# Altium PCB m.2 mk3.PcbDoc
Units mil, origin at the board's own origin, x right, y up, seen from the top; angles counter-clockwise.
Board outline 866.14 x 1181.1 mil, 2 copper layers (Top Layer, Bottom Layer), stack 31.1 mil thick; 19 components, 15 nets, 127 pads, 19 vias.
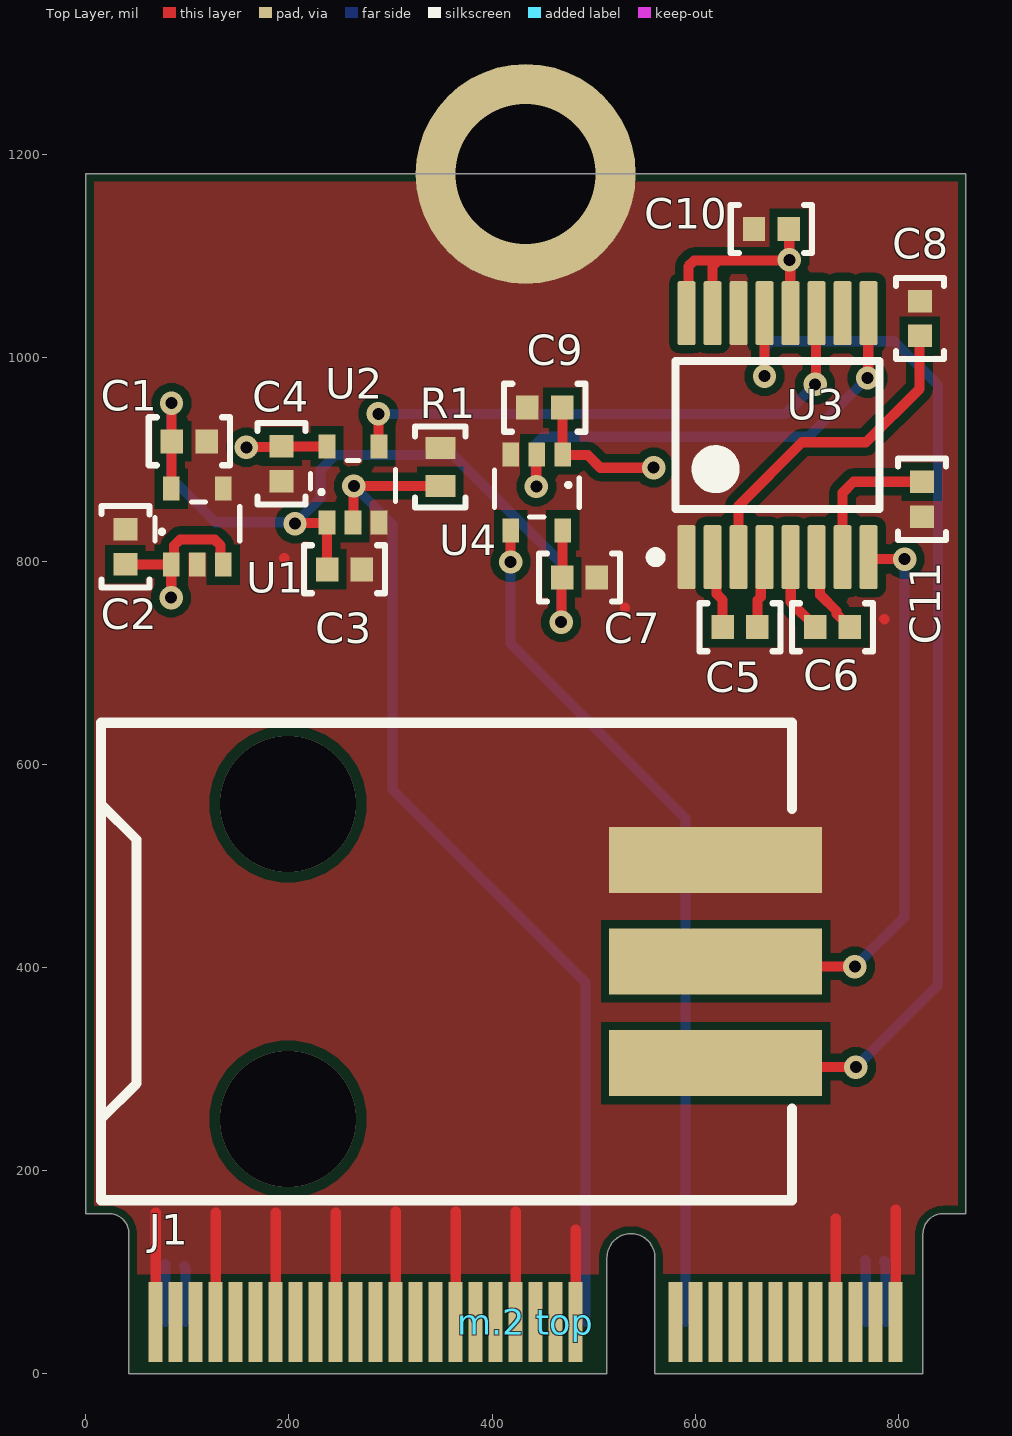
[diagram p0: Top Layer view]
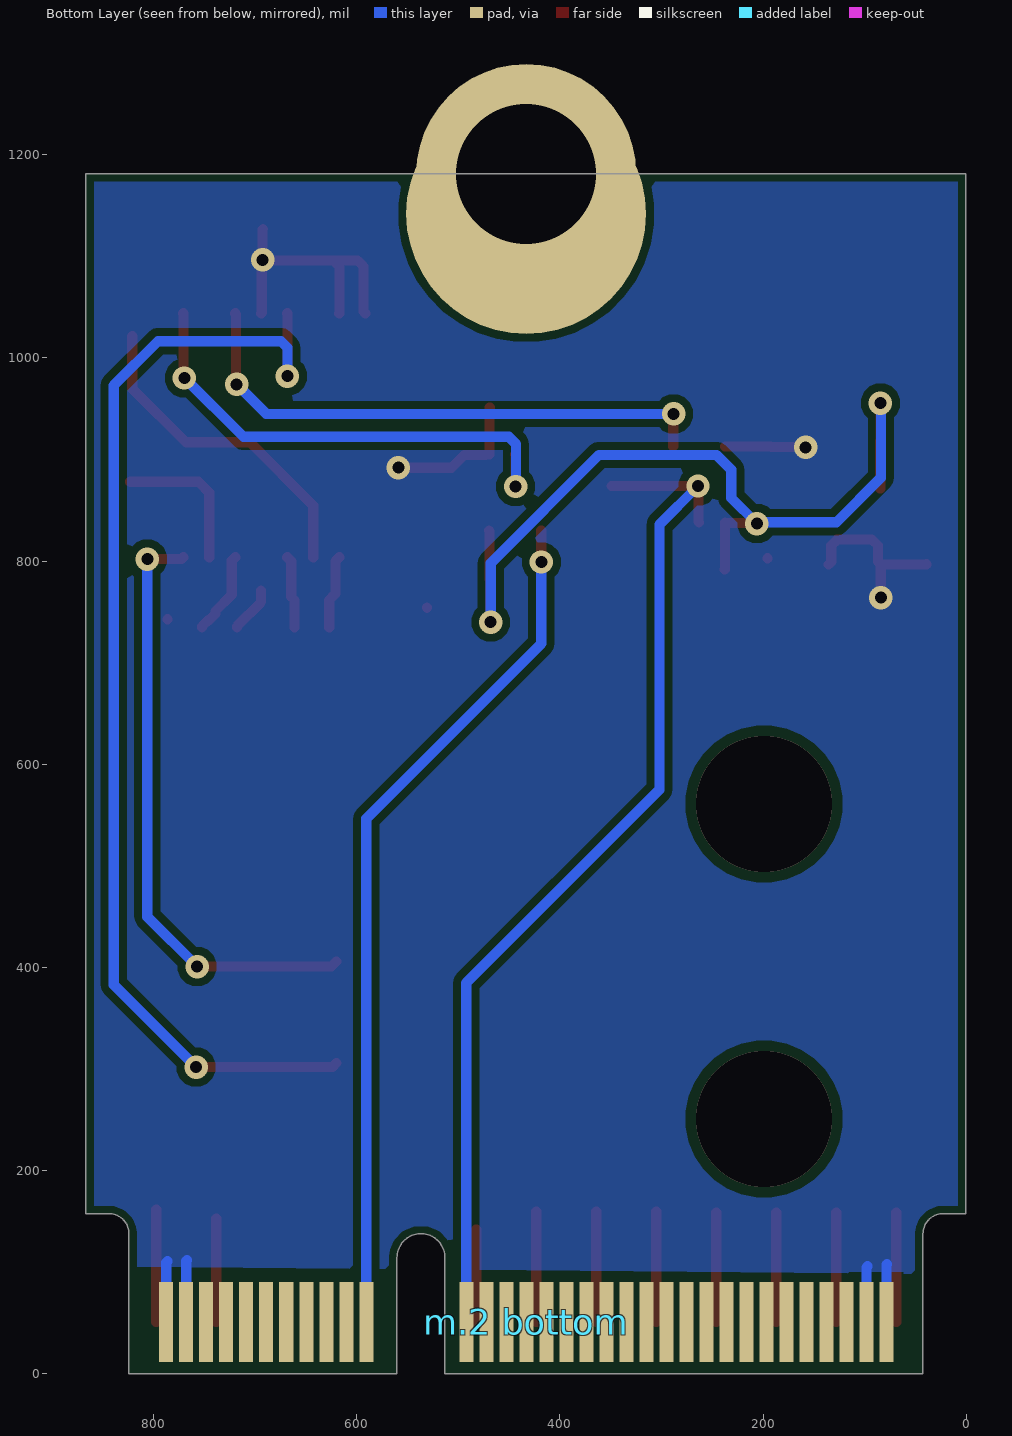
[diagram p1: Bottom Layer view, seen from below]
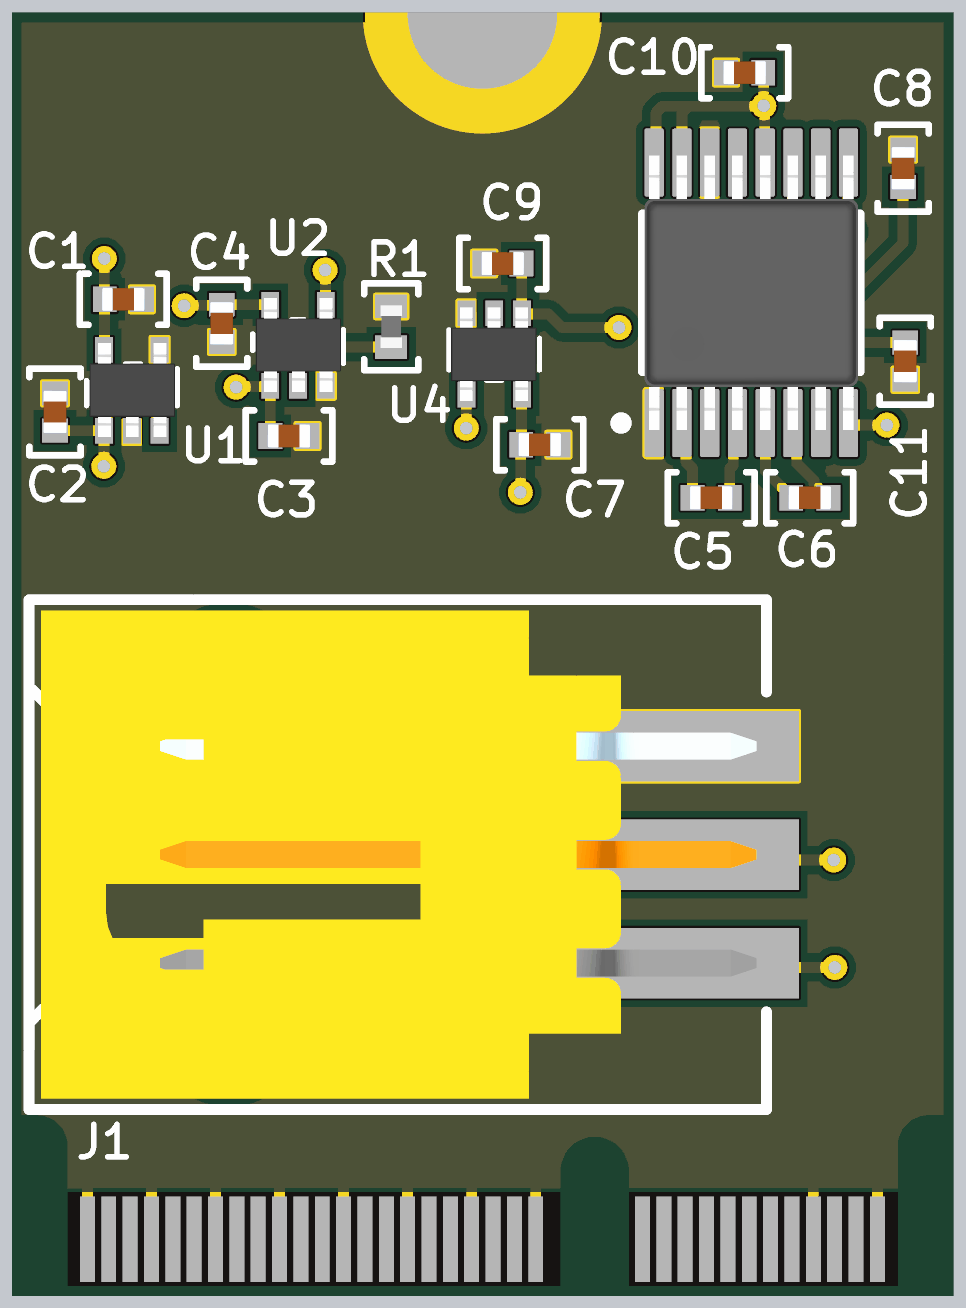
[diagram p2: 3D render of the assembled board from above, using the file's embedded part models]

## Layer stack, top to bottom
Top Solder: solder mask 0.4, Solder Resist, Dk 3.5
Top Layer: signal copper 1.4
Dielectric 1: dielectric 28.3, FR-4, Dk 4.8
Bottom Layer: signal copper 1.4
Bottom Solder: solder mask 0.4, Solder Resist, Dk 3.5

## Board outline
42.57,0.25 42.57,138.05 ccw(c22.89,138.05) 22.89,157.73 0.25,157.73 0.25,1181.35 866.39,1181.35 866.39,157.73 843.75,157.73 ccw(c843.75,138.05) 824.07,138.05 824.07,0.25 560.29,0.25 560.29,114.42 ccw(c536.67,114.42) 513.05,114.42 513.05,0.25

## Design rules (kind name [scope] priority, off if disabled: settings)
AcuteAngle [All] p1 off: minimum=6.00000000000000E+0001 checktracksonly=FALSE
BoardOutlineClearance "BoardOutlineClearance JLCPCB" [All] p1: gap=7.87 ignorepadtopadclearanceinfootprint=FALSE
Clearance "Clearance JLCPCB 1oz" [All] p1: gap=7.87 ignorepadtopadclearanceinfootprint=FALSE except(5: Arc-Arc Arc-Track Arc-SMDPad Track-Track Track-SMDPad SMDPad-SMDPad; 10: Arc-Hole Track-Hole SMDPad-Hole THPad-Hole Via-Hole Fill-Hole Poly-Hole Region-Hole Text-Hole)
DiffPairsRouting [All] p1: maxlimit=10 minlimit=6 mostfreqgap=8 toplayer_minwidth=8 toplayer_maxwidth=15 toplayer_prefwidth=8 bottomlayer_minwidth=8 bottomlayer_maxwidth=15 bottomlayer_prefwidth=8 maxuncoupledlength=500
HoleSize "HoleSize JLCPCB Pad" [IsPad] p1: absolutevalues=TRUE maxlimit=248.03 minlimit=19.68 maxpercent=80.000 minpercent=20.000
HoleSize "HoleSize JLCPCB 2 layer" [All] p2: absolutevalues=TRUE maxlimit=248.03 minlimit=11.81 maxpercent=80.000 minpercent=20.000
HoleToHoleClearance "HoleToHoleClearance JLCPCB" [All] p1: gap=10 allowstackedmicrovias=TRUE
MinimumAnnularRing "MinimumAnnularRing JLCPCB Pad" [IsPad] p1: minimumring=11.81
MinimumAnnularRing "MinimumAnnularRing JLCPCB 1oz" [All] p2: minimumring=5.24
MinimumSolderMaskSliver [All] p1: minsoldermaskwidth=1
PlaneConnect [All] p1: planeconnectstyle=Direct reliefexpansion=20 reliefentries=4 reliefconductorwidth=10 reliefairgap=10
PolygonConnect "PolygonConnect 3V3" [InNet('3V3')] p1: thpad.connectstyle=Relief thpad.reliefconductorwidth=10 thpad.reliefentries=4 thpad.polygonreliefangle="90 Angle" thpad.airgapwidth=10 smdpad.connectstyle=Relief smdpad.reliefconductorwidth=10 smdpad.reliefentries=4 smdpad.polygonreliefangle="90 Angle" smdpad.airgapwidth=10 via.connectstyle=Direct via.reliefconductorwidth=10 via.reliefentries=4 via.polygonreliefangle="90 Angle" via.airgapwidth=10
PolygonConnect "PolygonConnect Direct Connect" [All] p2: connectstyle=Direct reliefconductorwidth=15 reliefentries=4 polygonreliefangle="45 Angle" airgapwidth=10
RoutingVias "RoutingVias JLCPCB" [All] p1: holewidth=15.75 width=31.5 viastyle="Through Hole" minholewidth=11.81 minwidth=15.75 maxholewidth=28 maxwidth=50
SilkToSilkClearance [All] p1: silktosilkclearance=3
SilkToSolderMaskClearance "SilkToSolderMaskClearance JLCPCB" [IsPad] p1: minsilkscreentomaskgap=5.91 clearancetoexposedcopper=TRUE
SolderMaskExpansion "SolderMaskExpansion JLCPCB" [All] p1: expansion=1.97 istentingtop=FALSE
Width "Width JLCPCB 2oz" [All] p1: maxlimit=200 minlimit=7.87 preferedwidth=10 minimp=50.000000 maximp=50.000000 favimp=50.000000
23 further rules are at their usual default settings.

## Components (designator, comment, footprint, x,y, rotation, side; value= is the part's Value field where it differs from the comment)
C1 "1uF Ceramic 16V" CAPACITOR_0402 102,918 r0 top value=1uF
C2 "1uF Ceramic 16V" CAPACITOR_0402 39,814.13 r90 top value=1uF
C3 "100nF Ceramic 25V" CAPACITOR_0402 254.72,792 r0 top value=0.1uF
C4 "100nF Ceramic 25V" CAPACITOR_0402 192.72,895.87 r270 top value=0.1uF
C5 "100nF Ceramic 25V" CAPACITOR_0402 644,735 r180 top value=0.1uF
C6 "100nF Ceramic 25V" CAPACITOR_0402 735,735 r180 top value=0.1uF
C7 "100nF Ceramic 25V" CAPACITOR_0402 486,784 r180 top value=0.1uF
C8 "100nF Ceramic 25V" CAPACITOR_0402 821,1038.87 r90 top value=0.1uF
C9 "100nF Ceramic 25V" CAPACITOR_0402 451.87,951 r180 top value=0.1uF
C10 "100nF Ceramic 25V" CAPACITOR_0402 674.87,1127 r0 top value=0.1uF
C11 "100nF Ceramic 25V" CAPACITOR_0402 823,861 r90 top value=0.1uF
J1 "CONN HEADER SMD R/A 3POS 2.54MM" 0015912035 620,406 r270 top
"m.2 bottom" "M.2 (BOTTOM)" "M.2 (bottom)" 787.4,51.18 r0 top
"m.2 top" "M.2 (TOP)" "M.2 (top)" 797.24,51.18 r0 top
R1 "10k Ohm 1% 1/16W" RESISTOR_0402 349,892.7 r90 top
U1 "TLV70018DCKR" SOT-353 109.86,796.68 r0 top
U2 "FXLP34P5X" SOT-353 263.06,838.2 r0 top
U3 "SN65C3221EPWR" PW0016A_M 681,924 r90 top
U4 "FXLP34P5X" SOT-353 444,905 r180 top

## Footprints (in the part's own frame and the unit in brackets; to place one, negate y for a bottom-side part, rotate by r counter-clockwise, add the part's x,y. Pads: shape width x height; smd on the part's side, far side on the other; paste and mask are expansions set on the pad)
0015912035 [mm]
  rect 1.65x5.33 smd: 1(2.54,0) 2(0,0) 3(-2.54,0)
  silkscreen extent -5.97,-15.37 5.97,1.91, body extent -5.71,-15.09 5.72,1.68, height 6.98
CAPACITOR_0402 [mm]
  rect 0.56x0.6 smd: 1(-0.435,0) 2(0.435,0)
  silkscreen extent -1.02,-0.6 1.02,0.6, body extent -0.5,-0.28 0.5,0.27, height 0.51
"M.2 (bottom)" [mm]
  rect 0.35x2 smd far side: 2(0,0) 4(-0.5,0) 6(-1,0) 8(-1.5,0) 10(-2.001,0) 12(-2.501,0) 14(-3.001,0) 16(-3.501,0) 18(-4.001,0) 20(-4.501,0) 22(-5.001,0) 32(-7.501,0) 34(-8.002,0) 36(-8.502,0) 38(-9.002,0) 40(-9.502,0) 42(-10.002,0) 44(-10.502,0) 46(-11.002,0) 48(-11.502,0) 50(-12.003,0) 52(-12.503,0) 54(-13.003,0) 56(-13.503,0) 58(-14.003,0) 60(-14.503,0) 62(-15.003,0) 64(-15.503,0) 66(-16.004,0) 68(-16.504,0) 70(-17.004,0) 72(-17.504,0) 74(-18.004,0)
"M.2 (top)" [mm] "M.2 E-Key Fingers on the top side"
  rect 0.35x2 smd: 1(0,0) 3(-0.5,0) 5(-1,0) 7(-1.5,0) 9(-2,0) 11(-2.5,0) 13(-3,0) 15(-3.5,0) 17(-4,0) 19(-4.5,0) 21(-5,0) 23(-5.5,0) 33(-8,0) 35(-8.5,0) 37(-9,0) 39(-9.5,0) 41(-10,0) 43(-10.5,0) 45(-11,0) 47(-11.5,0) 49(-12,0) 51(-12.5,0) 53(-13,0) 55(-13.5,0) 57(-14,0) 59(-14.5,0) 61(-15,0) 63(-15.5,0) 65(-16,0) 67(-16.5,0) 69(-17,0) 71(-17.5,0) 73(-18,0) 75(-18.5,0)
PW0016A_M [mm] "SOP, 16-Leads, Body 5.1x4.5mm, Pitch 0.65mm, IPC Low Density"
  rrect22% 1.6x0.45 smd: 1(-3.05,2.275) 2(-3.05,1.625) 3(-3.05,0.975) 4(-3.05,0.325) 5(-3.05,-0.325) 6(-3.05,-0.975) 7(-3.05,-1.625) 8(-3.05,-2.275) 9(3.05,-2.275) 10(3.05,-1.625) 11(3.05,-0.975) 12(3.05,-0.325) 13(3.05,0.325) 14(3.05,0.975) 15(3.05,1.625) 16(3.05,2.275)
  silkscreen extent -3.17,-2.55 1.85,3.17, body extent -3.21,-2.5 3.21,2.5, height 1
RESISTOR_0402 [mm] "Resistor 0402"
  rect 0.55x0.75 smd: 1(-0.475,0) 2(0.475,0)
  silkscreen extent -1.02,-0.64 1.02,0.64, body extent -0.5,-0.25 0.5,0.25, height 0.25
SOT-353 [mm]
  rect 0.42x0.6 smd: 1(-0.65,0) 2(0,0) 3(0.65,0) 4(0.65,1.9) 5(-0.65,1.9)
  silkscreen extent -1.06,0.59 1.06,1.56, body extent -0.99,-0.14 1.01,2.06, height 0.96

## Part data
C1 C2: library part CAPACITOR_1uF_0402, "Cap 1uF 16V +/-10% / Ceramic 0402", Supplier Part Number 1=478-0402YD105KAT4ADKR-ND, Tolerance="+/- 10%", Voltage=16V, Made By="Robert Pafford", Supplier 1=Digi-Key
C3 C4 C5 C6 C7 C8 C9 C10 C11: library part CAPACITOR_0.1uF_0402, "Cap 100nF 25V +/-10% / Ceramic 0402", Supplier Part Number 1=478-7868-1-ND, Tolerance="+/- 10%", Voltage=25V, Made By="Robert Pafford", Supplier 1=Digi-Key
J1: "Connector Header Surface Mount, Right Angle 3 position 0.100\" (2.54mm)", Circuits=3, Created by="Ethan Rosati"
"m.2 top": "M.2 E-Key top fingers", Created by="Ethan Rosati"
R1: library part RESISTOR_10K_0402, "RES 10k OHM 1% 1/16W 0402", Digikey Part Numer=CR0603-JW-104ELFTR-ND, Supplier Part Number 1=YAG3436CT-ND, Tolerance="+/- 1%", Value  (Ohms)=10K, Made By="Robert Pafford", Supplier=Digikey, Supplier 1=Digi-Key, Wattage=1/16W
U1: "Fixed Positive LDO Regulator, 1.8V, PMOS, PDSO5", Max Voltage="5.5 V", Min Voltage="2 V", Output Current="200 mA", Output Voltage="1.8 V", Supplier Part Number 1=595-TLV70018DCKR, Made By="Ethan Rosati", Supplier 1=Mouser
U2 U4: "Interface Circuit, CMOS, PDSO5", Max Voltage="3.6 V", Min Voltage="1.0 V", Supplier Part Number 1=FXLP34P5XCT-ND, Made By="Ethan Rosati", Supplier 1=Digikey
U3: library part CMP-0299-01595-2, "3-V to 5.5-V Single-Channel RS-232 1-Mbit/s Line Driver / Receiver with ±15-kV IEC ESD Protection, -40 to 85 degC, 16-Pin SSOP (DB), Green (RoHS & no Sb/Br)", Drivers Per Package=1, Supply Voltage(s)(V)="3.3 or 5.0", ComponentLink1Description="Manufacturer URL", ComponentLink1URL=www.ti.com, ComponentLink2Description=Datasheet, ComponentLink2URL=http://www.ti.com/general/docs/lit/getliterature.tsp?genericPartNumber=SN65C3221E&fileType=pdf, ComponentLink3Description="Package Specification", ComponentLink3URL=http://www.ti.com/litv/pdf/mpds361, DatasheetVersion=SLLS694B, ESD HBM(kV)=+/-15, ICC(Max)(mA)=1, IEC-61000-4-2 SUPPORT=TRUE, PackageDescription="16-Pin Plastic Thin Small Outline Package 5 x 4.4 mm Body ,0.65 mm Pitch", PackageReference=PW0016A, PackageVersion="revG, Feb-2011", Receivers Per Package=1, RS-232=TRUE, Single Supply=TRUE, SubFamily=RS-232
"m.2 bottom": Created by="Ethan Rosati"

## Free pads (board coordinates)
  round 216.53 hole 137.79: 1(433.07,1181.1)
  round 236.22 smd far side: 2(433.07,1141.73)

## Via types
v1: diameter 23.05, hole 11.81, Top Layer to Bottom Layer, 17 vias
v2: diameter 133.86, hole 133.86, Top Layer to Bottom Layer, 2 vias

## Nets (pads, with @x,y where several pads share a name; then routed paths per layer and width w, separated by ;. In a path a pad name is that pad's centre, name@x,y a point inside that pad or via, vN(x,y) a via of type N, cw(c..) or ccw(c..) an arc to the next point about the centre after c; other vN are vias at no path point)
1.8V: C1.1 C3.1 C7.2 U1.5 U2.1 U4.5 | length 878.1
  Top Layer w10: v1@84,956 v1(84.44,955.56) 84.44,918.44 C1.1 84.57,917.7 84.57,871.79 U1.5 ; v1(206,837) 206.6,837.6 237,837.6 237.53,838.13 237.53,792.06 C3.1 ; v1(468,740) 468.44,740.44 468.44,783.56 C7.2 469.23,784.36 469.23,829.84 U4.5 U4.5@469.75,830.04 ; C7.2@468.85,781.85 C7.2@469.29,782.29
  Bottom Layer w10: v1@84,956 84,882 127.67,838.33 204.67,838.33 v1(206,837) 231.24,862.24 231.24,889.98 245.88,904.62 361.38,904.62 468,798 v1(468,740)
3V3: "m.2 bottom.2" "m.2 bottom.4" "m.2 bottom.72" "m.2 bottom.74" C2.1 C4.1 C9.1 C10.2 U1.1 U1.3 U2.5 U3.12 U3.15 U3.16 U4.1 | length 911.4
  Top Layer w10: C2.1 39.16,796.84 84.11,796.84 U1.1 ; v1(84,764) 84.13,764.13 84.13,796.55 U1.1 ; U1.3 132.81,799.32 132.81,815.34 126.95,821.2 92.76,821.2 86.91,815.34 86.91,799.32 U1.1 ; v1(158.09,912.09) 158.5,912.5 192.22,912.5 C4.1 U2.5 ; C9.1 469.3,950.7 469.3,905.3 U4.1 472.36,905 472.86,904.5 494.06,904.5 506.56,892 v1(559,892) ; U3.16 593.17,1045.81 593.17,1090.14 599.02,1096 622.86,1096 ; U3.15 617,1090.14 622.86,1096 ; C10.2 692.5,1126.5 v1(692.5,1096.5) v1@693,1096 ; U3.12 693.4,1044.48 693.4,1095.6 v1@693,1096 ; 622.86,1096 v1@693,1096
  Bottom Layer w9.84: 98,51.45 98.27,51.18
  Bottom Layer w10: 78,51.76 78.58,51.18 78.58,107.42 78,108 ; 97,106 98.27,104.73 98.27,51.18 ; 767,112 767.71,111.29 767.71,51.18 ; 786,111 787.4,109.6 787.4,51.18
Din: U2.4 U3.11 | length 544.9
  Top Layer w10: v1(288,945) 288.33,944.67 288.33,913.33 U2.4 ; v1(718,974) 718.69,974.69 718.69,1043.39 U3.11
  Bottom Layer w10: v1(288,945) 689,945 v1(718,974)
DOUT: J1.1 U3.13 | length 1125.9
  Top Layer w10: J1.1 624,302 v1(758,302) ; v1@668,982 v1(668.1,982.1) 668.1,1043.98 U3.13
  Bottom Layer w10: v1(668.1,982.1) 668.1,1010.1 674.46,1016.46 795.54,1016.46 839,973 839,383 v1(758,302)
GND: "m.2 top.1" "m.2 top.7" "m.2 top.33" "m.2 top.39" "m.2 top.45" "m.2 top.51" "m.2 top.57" "m.2 top.63" "m.2 top.69" "m.2 top.75" C1.2 C2.2 C3.2 C4.2 C7.1 C8.2 C9.2 C10.1 C11.1 J1.3 pad.1 pad.2 R1.2 U1.2 U1.4 U2.3 U3.1 U3.14 U4.3 | length 1061
  Top Layer w10: 68.89,51.18 68.89,158.89 ; 127.95,51.18 127.95,158.95 ; 187,51.18 187,159 ; 195.47,803 195.58,802.89 ; 246.06,51.18 246.06,158.94 ; 305.11,51.18 305.11,159.89 ; 364.17,51.18 364.17,159.83 ; 423.22,51.18 423.22,159.78 ; 482.28,51.18 482.28,142 ; 530.68,754.2 530.87,754.01 ; 738.19,51.18 738.19,153 ; 786,743 786.24,742.76 ; 797.24,51.18 797.24,161.76
NetC5_1: C5.1 U3.4 | length 71.9
  Top Layer w10: C5.1 661.13,761.81 664.35,765.03 664.35,800.06 U3.4
NetC5_2: C5.2 U3.2 | length 73
  Top Layer w10: U3.2 620.88,800.06 620.88,767.8 626.87,761.81 C5.2
NetC6_1: C6.1 U3.6 | length 82.9
  Top Layer w10: U3.6 722.87,800.44 722.87,766.98 738.9,750.95 738.9,748.23 745.32,741.81 746.1,741.81 752.13,735.79 C6.1
NetC6_2: C6.2 U3.5 | length 45.9
  Top Layer w10: 694,771 694,759.66 717.87,735.79 C6.2
NetC8_1: C8.1 U3.3 | length 328.6
  Top Layer w10: U3.3 642.61,854.61 705,917 768,917 820.76,969.76 820.76,1021.51 C8.1
NetC11_2: C11.2 U3.7 | length 145.9
  Top Layer w10: U3.7 744.98,867.39 755.71,878.13 C11.2
RIN: J1.2 U3.8 | length 596.6
  Top Layer w10: J1.2 625,401 v1(757,401) ; U3.8 772.49,802 v1(806,802)
  Bottom Layer w10: v1(757,401) 806,450 v1(806,802)
Rout: U3.9 U4.2 | length 492.1
  Top Layer w10: v1@443,873 v1(443.5,873.5) 443.5,904.5 U4.2 ; v1@770,981 770.28,981.28 770.28,1043.8 U3.9
  Bottom Layer w10: v1@443,873 443,915.14 450.26,922.4 711.4,922.4 v1@770,981
  other v1: 769.46,980.26
UART_RX: "m.2 bottom.22" U4.4 | length 850.8
  Top Layer w10: v1@418,799 v1(418.2,799.2) 418.2,829.99 U4.4
  Bottom Layer w10: v1(418.2,799.2) 418.2,718.8 590.5,546.5 590.5,51.18
UART_TX: "m.2 bottom.32" R1.1 U2.2 | length 1038.5
  Top Layer w10: U2.2 263.53,838.67 263.53,873.53 v1(264,874) R1.1
  Bottom Layer w10: v1(264,874) 302,836 302,575 492.07,384.93 492.07,51.18
pads on no net: "m.2 bottom.6" "m.2 bottom.8" "m.2 bottom.10" "m.2 bottom.12" "m.2 bottom.14" "m.2 bottom.16" "m.2 bottom.18" "m.2 bottom.20" "m.2 bottom.34" "m.2 bottom.36" "m.2 bottom.38" "m.2 bottom.40" "m.2 bottom.42" "m.2 bottom.44" "m.2 bottom.46" "m.2 bottom.48" "m.2 bottom.50" "m.2 bottom.52" "m.2 bottom.54" "m.2 bottom.56" "m.2 bottom.58" "m.2 bottom.60" "m.2 bottom.62" "m.2 bottom.64" "m.2 bottom.66" "m.2 bottom.68" "m.2 bottom.70" "m.2 top.3" "m.2 top.5" "m.2 top.9" "m.2 top.11" "m.2 top.13" "m.2 top.15" "m.2 top.17" "m.2 top.19" "m.2 top.21" "m.2 top.23" "m.2 top.35" "m.2 top.37" "m.2 top.41" "m.2 top.43" "m.2 top.47" "m.2 top.49" "m.2 top.53" "m.2 top.55" "m.2 top.59" "m.2 top.61" "m.2 top.65" "m.2 top.67" "m.2 top.71" "m.2 top.73" U3.10
copper on no net:
  other v2: 199.13,250.88 199.13,561.12

## Polygon pours and split planes (outlines as drawn)
no net on Top Solder "soldermask begone (top)" (solid): 828,95 828,0 44,0 44,95
no net on Bottom Solder "NONET_L-01_P-001" (solid): 45,95 825,95 825,0 45,0
GND on Top Layer "GND_L01_P003" (solid, pour order 3): 866.68,98 3.68,98 3.68,1209 866.68,1209
3V3 on Bottom Layer "3V3_L02_P004" (solid, pour order 4): 0,98 880.62,106.29 866.49,1174 4.48,1174

## Silkscreen, mask and mechanical layers (free items; w line width, h text height)
Mechanical 1:
  lines w0.5: 0.25,157.73 0.25,1181.35 866.39,1181.35 866.39,157.73 ; 11.25,809.73 33.89,809.73 ; 33.89,768.73 cw(c33.89,749.05) 53.57,749.05 ; 42.57,138.05 42.57,0.25 513.05,0.25 ; 560.29,0.25 824.07,0.25 824.07,138.05 ; 813.07,719.05 cw(c832.75,719.05) 832.75,738.73 855.39,738.73